# Altium PCB ZYNQ-HS-DEV-PCB.PcbDoc (part 13 of 13)
Units mm, origin at the board's own origin, x right, y up, seen from the top; angles counter-clockwise.
Board outline 125.73 x 111.93 mm, 10 copper layers (S1 (SIG), S2 (GND), S3 (SIG), S4 (GND), S5 (PWR), S6 (SIG), S7 (GND), S8 (SIG), S9 (GND), S10 (SIG)), stack 1.597 mm thick; 545 components, 400 nets, 2449 pads, 1577 vias.
Unrouted connection lines stored in the file: 309.
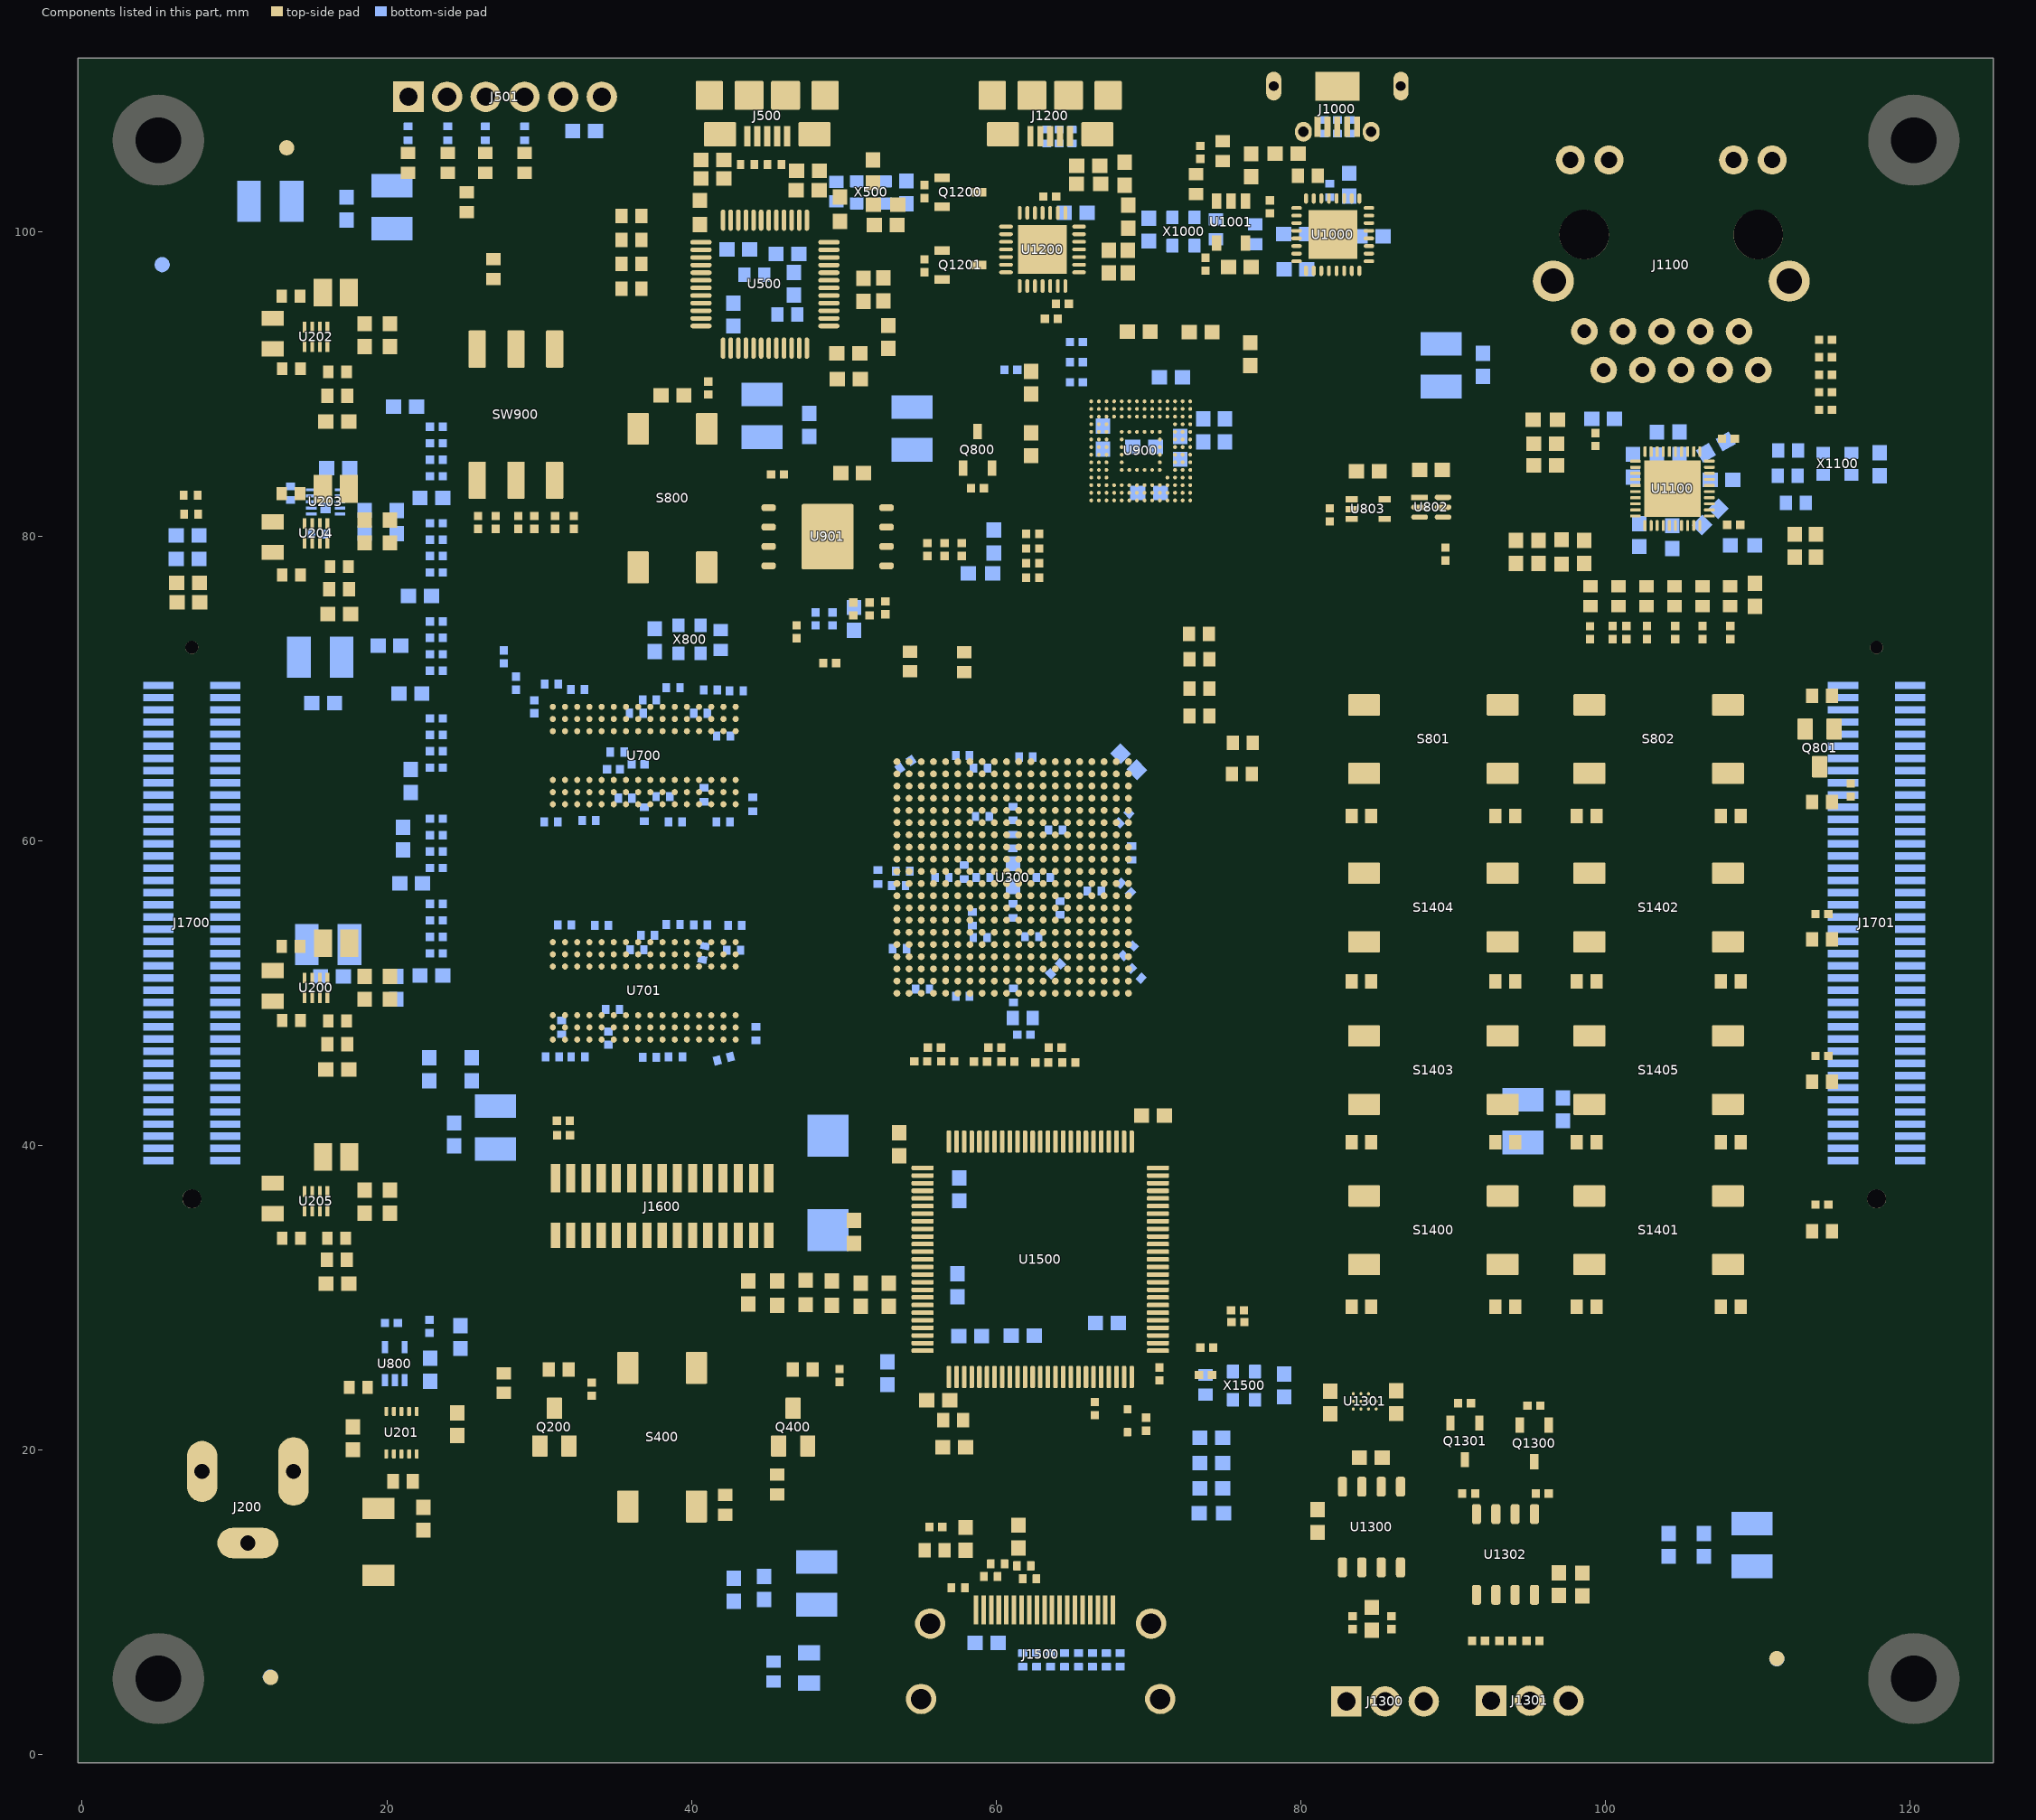
[diagram p20: the components of this part, seen from the top]

## Polygon pours and split planes (outlines as drawn) (continued)
GND on S1 (SIG) "GND_L01_P281" (solid, pour order 281): 18.279,91.95 19.39,91.95 cw(c19.39,91.601) 19.739,91.601 19.739,90.286 ccw(c20.235,90.286) 20.235,89.79 22.925,89.79 ccw(c22.925,90.236) 23.371,90.236 23.371,92.469 ccw(c22.89,92.469) 22.89,92.95 18.367,92.95 ccw(c18.367,92.658) 18.075,92.658 18.075,92.154 ccw(c18.279,92.154)
GND on S1 (SIG) "GND_L01_P283" (solid, pour order 283): 18.279,49.105 19.39,49.105 cw(c19.39,48.756) 19.739,48.756 19.739,47.441 ccw(c20.235,47.441) 20.235,46.945 22.925,46.945 ccw(c22.925,47.391) 23.371,47.391 23.371,49.624 ccw(c22.89,49.624) 22.89,50.105 18.367,50.105 ccw(c18.367,49.813) 18.075,49.813 18.075,49.309 ccw(c18.279,49.309)
GND on S1 (SIG) "GND_L01_P284" (solid, pour order 284): 18.279,35.06 19.39,35.06 cw(c19.39,34.711) 19.739,34.711 19.739,33.396 ccw(c20.235,33.396) 20.235,32.9 22.925,32.9 ccw(c22.925,33.346) 23.371,33.346 23.371,35.579 ccw(c22.89,35.579) 22.89,36.06 18.367,36.06 ccw(c18.367,35.767) 18.075,35.767 18.075,35.263 ccw(c18.279,35.263)
+3V3 on S1 (SIG) "+3V3_L01_P289" (solid, pour order 289): 16.826,40.457 16.826,36.849 ccw(c17.275,36.849) 17.275,36.4 22.9,36.4 ccw(c22.9,36.85) 23.35,36.85 23.35,41.8 ccw(c22.9,41.8) 22.9,42.25 17.25,42.25 ccw(c17.25,41.8) 16.8,41.8 16.8,40.675
GND on S1 (SIG) "GND_L01_P279" (solid, pour order 279): 75.925,104.712 75.925,106.187 cw(c76.125,106.187) 76.125,106.387 78.95,106.387 cw(c78.95,106.237) 79.1,106.237 79.1,104.662 cw(c78.95,104.662) 78.95,104.512 76.125,104.512 cw(c76.125,104.712)
1V8_SW on S1 (SIG) "1V8_SW_L01_P275" (solid, pour order 275): 15.8,93.35 15.8,95.05 16.5,95.05 16.5,96.95 15.1,96.95 15.1,95.05 15.4,95.05 15.4,93.35
1V0_SW on S1 (SIG) "1V0_SW_L01_P278" (solid, pour order 278): 15.8,50.625 15.8,52.325 16.5,52.325 16.5,54.225 15.1,54.225 15.1,52.325 15.4,52.325 15.4,50.625
3V3_SW on S1 (SIG) "3V3_SW_L01_P277" (solid, pour order 277): 15.8,36.6 15.8,38.3 16.5,38.3 16.5,40.2 15.1,40.2 15.1,38.3 15.4,38.3 15.4,36.6
+VCC on S1 (SIG) "+VCC_L01_P285" (solid, pour order 285): 20.675,19.825 20.675,19.425 ccw(c21.05,19.425) 20.812,19.135 cw(c20.402,18.633) 21.05,18.633 21.05,17.712 cw(c20.538,17.712) 20.538,17.2 18.723,17.2 ccw(c18.723,16.652) 18.175,16.652 18.175,15.69 ccw(c18.715,15.69) 18.715,15.15 20.925,15.15 ccw(c20.925,15.525) 21.206,15.276 cw(c21.758,14.787) 21.758,15.525 22.875,15.525 ccw(c22.875,15.925) 23.275,15.925 23.275,19.825 ccw(c22.925,19.825) 22.925,20.175 21.025,20.175 ccw(c21.025,19.825)
+3V3 on S5 (PWR) "S5 (PWR)-+3V3" (solid, pour order 409): 0,0 125.25,0 125.25,111 85.675,111 85.675,108.748 83.85,108.748 83.85,111 80.95,111 80.95,108.748 79.125,108.748 79.125,111 0,111
+1V35 on S5 (PWR) "1v35" (solid, remove dead copper, pour order 297): 55.725,59.875 55.725,60.15 ccw(c55.525,60.15) 55.525,60.35 cw(c55.525,60.604) 55.271,60.604 55.271,62.178 56.071,62.178 ccw(c56.071,62.632) 56.525,62.632 56.525,65.4 ccw(c55.95,65.4) 55.95,65.975 54.725,65.975 ccw(c54.725,65.4) 54.15,65.4 54.15,61.9 cw(c53.3,61.9) 53.3,61.05 44.925,61.05 cw(c44.925,61.975) 44,61.975 44,69.475 ccw(c42.975,69.475) 42.975,70.5 22.275,70.5 cw(c22.275,71.7) 21.075,71.7 21.075,85 ccw(c19.9,85) 19.9,86.175 17.975,86.175 ccw(c17.975,85.125) 16.925,85.125 16.925,65.35 ccw(c18.303,65.35) 18.303,63.972 28.178,63.972 cw(c28.178,63.098) 29.052,63.098 29.052,46.523 ccw(c30.7,46.523) 30.7,44.875 44.55,44.875 ccw(c44.55,45.95) 45.625,45.95 45.625,49.65 cw(c46.125,49.65) 46.125,50.15 54.15,50.15 ccw(c54.15,52.525) 56.525,52.525 56.525,53.6 ccw(c56.15,53.6) 56.15,53.975 55.625,53.975 cw(c55.625,54.325) 55.275,54.325 55.275,59.425 cw(c55.534,59.425) 55.534,59.684 ccw(c55.534,59.875)
+1V0 on S5 (PWR) "S5 (PWR)-+1V0" (solid, pour order 315): 17.325,41.325 61.55,41.325 ccw(c61.55,43.075) 63.3,43.075 63.3,53 cw(c63.4,53) 63.4,53.1 ccw(c63.4,53.625) 63.925,53.625 63.925,59.75 ccw(c62.425,59.75) 62.425,61.25 58.125,61.25 ccw(c58.125,60.8) 57.675,60.8 57.675,53.525 ccw(c58.1,53.525) 58.1,53.1 61.325,53.1 cw(c61.325,52.75) 61.675,52.75 61.675,47.425 cw(c60.975,47.425) 60.975,46.725 24.603,46.725 cw(c24.603,47.978) 23.35,47.978 23.35,55.283 ccw(c22.338,55.283) 22.337,56.295 17.812,56.295 ccw(c17.812,55.283) 16.8,55.283 16.8,54.72 16.826,54.502 16.826,50.895 ccw(c17.275,50.895) 16.964,50.57 17.063,47.722 cw(c16.1,47.688) 16.508,46.816 ccw(c16.807,46.175) 16.1,46.175 16.1,42.55 ccw(c17.325,42.55)
CHASSIS on S5 (PWR) "tg" (solid, pour order 405): 125.231,-0.01 125.259,-0.01 125.259,2.99 125.231,2.99 125.231,107.968 125.232,107.968 125.232,110.968 85.675,110.968 85.675,108.748 83.85,108.748 83.85,110.968 80.95,110.968 80.95,108.748 79.125,108.748 79.125,110.968 36,110.968 36,108.75 ccw(c36.782,108.75) 36.782,107.968 79.3,107.968 79.3,106.15 ccw(c79.725,106.15) 79.725,105.725 80.7,105.725 ccw(c80.7,106.1) 81.075,106.1 81.075,107.075 cw(c81.968,107.075) 81.968,107.968 83.307,107.968 cw(c83.307,107.275) 84,107.275 84,105.725 85.55,105.725 85.55,107.275 cw(c86.243,107.275) 86.243,107.968 116,107.968 116,104.74 ccw(c118.54,104.74) 118.529,102.2 93.25,102.2 ccw(c93.25,101.475) 92.525,101.475 92.525,96.518 ccw(c93.993,96.518) 93.993,95.05 120.75,95.05 cw(c120.75,93.569) 122.231,93.569 122.231,9.25 118.99,9.25 ccw(c118.99,6.71) 116.45,6.71 116.45,2.99 74.635,2.99 cw(c74.635,4.175) 73.45,4.175 73.45,9.875 ccw(c71.9,9.875) 71.9,11.425 53.6,11.425 ccw(c53.6,9.7) 51.875,9.7 51.875,4.95 cw(c49.915,4.95) 49.915,2.99 9.25,2.99 9.25,6.26 ccw(c6.71,6.26) 6.71,8.8 3.001,8.8 3.001,101.75 6.26,101.75 ccw(c6.26,104.29) 8.8,104.29 8.8,108 18.55,108 ccw(c18.55,108.45) 19,108.45 19,111 0,111 0,108 0.001,108 0.001,2.99 0,2.99 0,-0.01 122.231,-0.01 122.231,-0.042 125.231,-0.042
+1V8 on S5 (PWR) "S5 (PWR)-+1V8" (solid, pour order 299): 88.275,22.225 96.7,22.225 ccw(c96.7,23.525) 98,23.525 98,25.275 ccw(c96.2,25.275) 96.2,27.075 94.056,27.075 cw(c94.056,31.156) 89.975,31.156 89.975,64.65 cw(c93.85,64.65) 93.85,68.525 108.318,68.525 ccw(c108.318,69.931) 109.72,70.03 ccw(c108.386,70.227) 108.386,71.575 90.475,71.575 cw(c90.475,73.825) 89.975,71.631 89.975,71.675 89.812,71.675 cw(c90.475,73.825) 88.225,73.825 88.225,79.075 ccw(c87.65,79.075) 87.65,79.65 cw(c87.65,80.525) 86.775,80.525 86.775,100.701 ccw(c86.428,100.701) 86.425,101.049 81.175,101.009 77.853,100.983 ccw(c77.861,99.922) 76.8,99.922 76.8,98.45 ccw(c77.75,98.45) 77.75,97.5 79.56,97.5 cw(c79.56,95.885) 81.175,95.885 81.175,84.225 cw(c78.725,84.225) 78.725,81.775 66.6,81.775 cw(c66.6,82.925) 65.45,82.925 65.45,85.25 ccw(c64.575,85.25) 64.575,86.125 61.25,86.125 cw(c61.25,86.725) 60.65,86.725 60.65,86.925 ccw(c60.1,86.925) 60.1,87.475 47.175,87.475 cw(c47.175,89.5) 45.15,89.5 45.15,93.825 cw(c46.4,93.825) 46.4,95.075 55.175,95.075 ccw(c55.175,98.275) 58.375,98.275 58.375,103.275 ccw(c55.925,103.275) 55.925,105.725 ccw(c55.925,103.35) 53.55,103.35 53.55,99.15 47.475,99.15 ccw(c47.475,92.125) 40.45,92.125 40.45,88.8 cw(c39.125,88.8) 39.125,87.475 35.8,87.475 cw(c35.8,88.05) 35.225,88.05 35.225,91.625 ccw(c34.775,91.625) 34.775,92.075 25.425,92.075 cw(c25.425,93.275) 24.225,93.275 24.225,98.732 ccw(c22.782,98.732) 22.782,100.175 18.125,100.175 ccw(c18.124,98.901) 16.85,98.9 16.85,92.075 16.8,92.025 16.8,89.05 ccw(c18.175,89.05) 18.175,87.675 22.175,87.675 cw(c22.175,86.125) 23.725,86.125 23.725,82.408 ccw(c24.008,82.408) 24.009,82.125 cw(c24.009,81.909) 24.225,81.909 24.225,77.625 ccw(c25.3,77.625) 25.3,76.55 59.475,76.55 cw(c59.475,75.6) 60.425,75.6 60.425,66.556 ccw(c60.856,66.556) 60.856,66.125 cw(c60.856,65.522) 61.459,65.525 61.465,64.414 cw(c60.656,64.409) 60.655,63.6 60.25,63.6 ccw(c60.25,62.707) 59.357,62.707 59.357,61.754 59.377,61.754 ccw(c60.306,59.976) 58.3,59.976 58.3,56.175 ccw(c60.45,56.175) 60.45,54.025 61.518,54.025 ccw(c61.518,54.782) 62.275,54.782 62.275,59.225 ccw(c62,59.225) 62,59.5 60.782,59.5 cw(c60.782,60.457) 59.825,60.457 cw(c60.692,60.457) 60.693,61.325 61.475,61.325 61.475,61.25 64.743,61.25 ccw(c64.743,61.957) 65.45,61.957 65.45,76.075 cw(c66.95,76.075) 66.95,77.575 75.6,77.575 cw(c75.6,75.225) 77.95,75.225 77.95,74.75 ccw(c84.175,74.75) 80.639,69.627 cw(c80.001,68.701) 81.125,68.701 81.125,38.625 cw(c77.95,38.625) 77.95,35.45 51.075,35.45 ccw(c51.075,29.45) 45.075,29.45 ccw(c47.5,29.45) 47.5,27.025 47.85,27.025 ccw(c47.85,29.375) 50.2,29.375 cw(c51.325,29.375) 51.325,30.5 80,30.5 cw(c80,29.375) 81.125,29.375 ccw(c88.275,29.375)
no net on Top Solder (solid): 122.231,-0.042 125.231,-0.042 125.231,-0.01 125.259,-0.01 125.259,2.99 125.231,2.99 125.231,107.968 125.232,107.968 125.232,110.968 36,110.968 36,107.968 116,107.968 116,104.74 ccw(c118.54,104.74) 118.54,102.2 122.231,102.2 122.231,9.25 118.99,9.25 ccw(c118.99,6.71) 116.45,6.71 116.45,2.99 9.25,2.99 9.25,6.26 ccw(c6.71,6.26) 6.71,8.8 3.001,8.8 3.001,101.75 6.26,101.75 ccw(c6.26,104.29) 8.8,104.29 8.8,108 19,108 19,111 0,111 0,108 0.001,108 0.001,2.99 0,2.99 0,-0.01 122.231,-0.01
GND on S2 (GND) "S2 (GND)-GND" (solid, pour order 437): 0,0 125.25,0 125.25,111 85.675,111 85.675,108.748 83.85,108.748 83.85,111 80.95,111 80.95,108.748 79.125,108.748 79.125,111 0,111
CHASSIS on S2 (GND) "S2 (GND)-CHASSIS" (solid, pour order 387): 125.231,-0.01 125.259,-0.01 125.259,2.99 125.231,2.99 125.231,107.968 125.232,107.968 125.232,110.968 85.675,110.968 85.675,108.748 83.85,108.748 83.85,110.968 80.95,110.968 80.95,108.748 79.125,108.748 79.125,110.968 36,110.968 36,107.968 116,107.968 116,104.74 ccw(c118.54,104.74) 118.54,102.2 122.231,102.2 122.231,9.25 118.99,9.25 ccw(c118.99,6.71) 116.45,6.71 116.45,2.99 9.25,2.99 9.25,6.26 ccw(c6.71,6.26) 6.71,8.8 3.001,8.8 3.001,101.75 6.26,101.75 ccw(c6.26,104.29) 8.8,104.29 8.8,108 19,108 19,111 0,111 0,108 0.001,108 0.001,2.99 0,2.99 0,-0.01 122.231,-0.01 122.231,-0.042 125.231,-0.042
GND on S4 (GND) "S4 (GND)-GND" (solid, pour order 433): 0,0 125.25,0 125.25,111 85.675,111 85.675,108.748 83.85,108.748 83.85,111 80.95,111 80.95,108.748 79.125,108.748 79.125,111 0,111
CHASSIS on S4 (GND) "S4 (GND)-CHASSIS" (solid, pour order 401): 125.231,-0.01 125.259,-0.01 125.259,2.99 125.231,2.99 125.231,107.968 125.232,107.968 125.232,110.968 85.675,110.968 85.675,108.748 83.85,108.748 83.85,110.968 80.95,110.968 80.95,108.748 79.125,108.748 79.125,110.968 36,110.968 36,107.968 116,107.968 116,104.74 ccw(c118.54,104.74) 118.54,102.2 122.231,102.2 122.231,9.25 118.99,9.25 ccw(c118.99,6.71) 116.45,6.71 116.45,2.99 9.25,2.99 9.25,6.26 ccw(c6.71,6.26) 6.71,8.8 3.001,8.8 3.001,101.75 6.26,101.75 ccw(c6.26,104.29) 8.8,104.29 8.8,108 19,108 19,111 0,111 0,108 0.001,108 0.001,2.99 0,2.99 0,-0.01 122.231,-0.01 122.231,-0.042 125.231,-0.042
GND on S7 (GND) "S7 (GND)-GND" (solid, pour order 441): 0,0 125.25,0 125.25,111 85.675,111 85.675,108.748 83.85,108.748 83.85,111 80.95,111 80.95,108.748 79.125,108.748 79.125,111 0,111
CHASSIS on S7 (GND) "S7 (GND)-CHASSIS" (solid, pour order 417): 125.231,-0.01 125.259,-0.01 125.259,2.99 125.231,2.99 125.231,107.968 125.232,107.968 125.232,110.968 85.571,110.968 85.571,108.748 83.85,108.748 83.85,110.968 80.95,110.968 80.95,108.748 79.229,108.748 79.229,110.968 36,110.968 36,107.968 116,107.968 116,104.74 ccw(c118.54,104.74) 118.54,102.2 122.231,102.2 122.231,9.25 118.99,9.25 ccw(c118.99,6.71) 116.45,6.71 116.45,2.99 9.25,2.99 9.25,6.26 ccw(c6.71,6.26) 6.71,8.8 3.001,8.8 3.001,101.75 6.26,101.75 ccw(c6.26,104.29) 8.8,104.29 8.8,108 19,108 19,111 0,111 0,108 0.001,108 0.001,2.99 0,2.99 0,-0.01 122.231,-0.01 122.231,-0.042 125.231,-0.042
no net on Bottom Solder (solid): 122.231,-0.042 125.231,-0.042 125.231,-0.01 125.259,-0.01 125.259,2.99 125.231,2.99 125.231,107.968 125.232,107.968 125.232,110.968 36,110.968 36,107.968 116,107.968 116,104.74 ccw(c118.54,104.74) 118.54,102.2 122.231,102.2 122.231,9.25 118.99,9.25 ccw(c118.99,6.71) 116.45,6.71 116.45,2.99 9.25,2.99 9.25,6.26 ccw(c6.71,6.26) 6.71,8.8 3.001,8.8 3.001,101.75 6.26,101.75 ccw(c6.26,104.29) 8.8,104.29 8.8,108 19,108 19,111 0,111 0,108 0.001,108 0.001,2.99 0,2.99 0,-0.01 122.231,-0.01
CHASSIS on S3 (SIG) "S3 (SIG)-CHASSIS" (solid, pour order 397): 125.231,-0.01 125.259,-0.01 125.259,2.99 125.231,2.99 125.231,107.968 125.232,107.968 125.232,110.968 85.675,110.968 85.675,108.748 83.85,108.748 83.85,110.968 80.95,110.968 80.95,108.748 79.125,108.748 79.125,110.968 36,110.968 36,107.968 116,107.968 116,104.74 ccw(c118.54,104.74) 118.54,102.2 122.231,102.2 122.231,9.25 118.99,9.25 ccw(c118.99,6.71) 116.45,6.71 116.45,2.99 9.25,2.99 9.25,6.26 ccw(c6.71,6.26) 6.71,8.8 3.001,8.8 3.001,101.75 6.26,101.75 ccw(c6.26,104.29) 8.8,104.29 8.8,108 19,108 19,111 0,111 0,108 0.001,108 0.001,2.99 0,2.99 0,-0.01 122.231,-0.01 122.231,-0.042 125.231,-0.042
GND on S6 (SIG) "GND_L06_P446" (solid, pour order 446): -0.272,111.384 125.46,111.384 125.46,-0.544 -0.272,-0.544
CHASSIS on S6 (SIG) "S6 (SIG)-CHASSIS" (solid, pour order 413): 125.231,-0.01 125.259,-0.01 125.259,2.99 125.231,2.99 125.231,107.968 125.232,107.968 125.232,110.968 85.675,110.968 85.675,108.748 83.85,108.748 83.85,110.968 80.95,110.968 80.95,108.748 79.125,108.748 79.125,110.968 36,110.968 36,107.968 116,107.968 116,104.74 ccw(c118.54,104.74) 118.54,102.2 122.231,102.2 122.231,9.25 118.99,9.25 ccw(c118.99,6.71) 116.45,6.71 116.45,2.99 9.25,2.99 9.25,6.26 ccw(c6.71,6.26) 6.71,8.8 3.001,8.8 3.001,101.75 6.26,101.75 ccw(c6.26,104.29) 8.8,104.29 8.8,108 19,108 19,111 0,111 0,108 0.001,108 0.001,2.99 0,2.99 0,-0.01 122.231,-0.01 122.231,-0.042 125.231,-0.042
CHASSIS on S8 (SIG) "S8 (SIG)-CHASSIS" (solid, pour order 421): 125.231,-0.01 125.259,-0.01 125.259,2.99 125.231,2.99 125.231,107.968 125.232,107.968 125.232,110.968 85.675,110.968 85.675,108.748 83.85,108.748 83.85,110.968 80.95,110.968 80.95,108.748 79.125,108.748 79.125,110.968 36,110.968 36,107.968 116,107.968 116,104.74 ccw(c118.54,104.74) 118.54,102.2 122.231,102.2 122.231,9.25 118.99,9.25 ccw(c118.99,6.71) 116.45,6.71 116.45,2.99 9.25,2.99 9.25,6.26 ccw(c6.71,6.26) 6.71,8.8 3.001,8.8 3.001,101.75 6.26,101.75 ccw(c6.26,104.29) 8.8,104.29 8.8,108 19,108 19,111 0,111 0,108 0.001,108 0.001,2.99 0,2.99 0,-0.01 122.231,-0.01 122.231,-0.042 125.231,-0.042

## Other copper
S1 (SIG):
  rectangle net +3V3: 69.637,92.96 70.675,94.65
  rectangle net GND: 96.075,83.475 98.125,86.8
  rectangle net GND: 111.95,77.3 114.3,79.125
  rectangle net GND: 66.096,96.3 69.275,98.125
  rectangle net GND: 85.67,21.25 86.825,22.9
  rectangle net GND: 81.175,21.125 82.75,22.975
  rectangle net GND: 96.225,11.397 99.267,13.275
  rectangle net GND: 84.825,16.85 85.95,20.55
  rectangle net GND: 80.625,13.35 81.7,15.1
  rectangle net GND: 51.45,104.1 53.275,105.2
  rectangle net GND: 51.315,99.275 52.7,100.961
  rectangle net GND: 50.775,96.45 53.075,98.1
  rectangle net GND: 42.95,104.008 43.768,105.375
  rectangle net GND: 45.65,102.225 47.375,104.4
  rectangle net GND: 39.375,103.1 41.125,105.35
  rectangle net GND: 52.241,91.2 54.05,92.884
  rectangle net GND: 16.675,20.925 18.85,23.125
  rectangle net GND: 16,23.425 18.025,24.95
  rectangle net +1V0_ETH: 110.275,79.475 114.6,80.8
  rectangle net +1V0_ETH: 109.375,77.9 111.3,80.8
  rectangle net +5V_UART: 64.359,100.775 65.225,101.692
S6 (SIG):
  pour cut-out: 9.039,63.66 20.469,63.647 ccw(c20.472,66.591) 23.416,66.591 cw(c30.55,66.591) 30.55,73.725 50.1,73.725 ccw(c50.1,76.3) 52.675,76.3 52.675,77.475 cw(c55.225,77.475) 55.225,80.025 57.275,80.025 cw(c57.275,77.55) 59.75,77.55 59.75,64.925 ccw(c61.109,64.958) 61.16,63.6 63.943,63.597 ccw(c63.945,64.838) 65.186,64.838 cw(c70.982,64.838) 70.982,70.634 112.666,70.634 cw(c112.666,64.6) 118.7,64.6 118.7,50.625 cw(c117.85,50.625) 117.85,49.775 110.947,49.775 78.575,49.775 ccw(c78.575,46.8) 75.6,46.8 75.6,43.35 cw(c65.525,43.35) 65.525,33.275 9.1,33.275 cw(c9.1,36.375) 6,36.375 6,60.625 cw(c9.035,60.625)
S8 (SIG):
  rectangle net +1V0_ETH: 109.275,77.975 111.3,80.775
S10 (SIG):
  rectangle net +1V35: 16.575,82.55 17.275,83.15
  region net GND: 99.95,88.425 99.95,86.925 101.975,86.925 101.975,88.425
  rectangle net GND: 73.125,87.197 75.511,89.225
  rectangle net GND: 53.5,102.7 54.75,104.375
  rectangle net GND: 50.317,100.775 51.525,102.334
  rectangle net GND: 42.3,96.475 44.025,97.925
  rectangle net GND: 36.225,73.225 39.875,74.825
  rectangle net GND: 22.95,105.675 25.1,106.275
  rectangle net GND: 28,105.675 30.15,106.275
  rectangle net GND: 25.425,105.675 27.575,106.275
  rectangle net GND: 20.35,105.675 22.5,106.275
  rectangle net +1V0_ETH: 109.3,78.025 111.3,80.775
  rectangle net HDR_TCK: 28.035,106.45 30.07,109.45
  rectangle net HDR_TDO: 25.495,106.45 27.53,109.45
  rectangle net HDR_TDI: 22.955,106.45 24.99,109.45
  rectangle net HDR_TMS: 20.415,106.45 22.45,109.45

## Silkscreen, mask and mechanical layers (free items; w line width, h text height)
Top Overlay:
  circle w0.254: c107.697,24.849 r0.506
  circle w0.254: c110.35,22.375 r0.506
  circle w0.254: c115.7,24.694 r0.506
  circle w0.254: c121.1,17.775 r0.506
  circle w0.254: c120.5,13.3 r0.506
  circle w0.254: c114.425,10.5 r0.506
  circle w0.254: c111,10.6 r0.506
  circle w0.254: c108.675,10.375 r0.506
  circle w0.254: c101.8,15.675 r0.506
  circle w0.254: c101.475,19.8 r0.506
  circle w0.2: c37.25,106.475 r0.15
  circle w0.4: c37.993,104.939 r0.2
  circle w0.254: c33.792,105.499 r0.506
  rectangle: 38.425,106.55 38.975,107.025
  region: 37.5,107.225 38,107.725 38.5,107.225
  lines w0.1: 29.975,24.55 32.6,24.55 32.6,25.925 29.975,25.925 29.975,24.55 ; 32.576,104.549 34.976,104.549 34.976,106.499 32.576,106.499 32.576,104.549 ; 46,24.675 48.6,24.675 48.6,25.925 46,25.925 46,24.675 ; 72.4,101.875 73.8,101.875 73.8,104.325 72.4,104.325 72.4,101.875
  lines w0.15: 112.925,33.55 112.925,35.15 115.45,35.15 115.45,33.55 ; 112.95,43.5 112.95,45.1 115.475,45.1 115.475,43.5 ; 112.975,52.75 112.975,54.35 115.5,54.35 115.5,52.75 ; 112.967,61.896 115.464,61.896 115.464,63.249 112.967,63.249 112.967,61.896
  lines w0.2: 37.25,106.025 37.973,105.302 ; 37.25,106.05 37.25,106.15 37.25,106.475 ; 37.973,105.502 38,105.502 38,105.139 ; 37.993,104.939 38,104.939 38,107.25 ; 38,105.67 38.7,106.37 38.7,106.825 ; 101.775,19.575 103.725,17.625 105.975,17.625 ; 102.075,16.15 102.2,16.275 104.725,16.275 106.075,14.925 106.075,14.2 ; 107.675,13.7 107.675,11.6 108.45,10.825 ; 107.675,24.35 107.725,24.3 107.725,19.575 ; 110.425,21.85 111.075,21.2 111.075,19.475 ; 111.025,11.175 111.05,11.2 111.05,13.625 ; 114.082,19.505 114.082,23.082 115.375,24.375 ; 114.7,10.9 115.575,11.775 115.575,13.575 ; 116.425,15.725 118.075,15.725 120.15,13.65 ; 116.45,17.75 117.55,17.75 117.75,17.95 117.75,18.65 117.75,18.85 118.025,19.125 118.375,19.125 118.725,19.125 119,18.85 119,17.95 119.2,17.75 120.55,17.75
  lines w0.3: 19.425,3.3 49.5,3.3 49.5,7.65 19.425,7.65 19.425,3.3
  lines w0.6: 81.448,27.352 81.448,59.452 110.838,59.452 110.848,27.352 81.448,27.352 ; 81.448,59.798 110.838,59.798 110.838,71.498 81.448,71.498 81.448,59.798
  text "UART" at 52.525,106.003 h3
  text "OTG" at 86.55,105.976 h3
  text "LED" at 70.85,103.525 h1
  text "JTAG" at 32.825,102.676 h3
  text "+1V8" at 10.65,98.868 h2
  text "BOOT MODES" at 24.05,94.563 h1.5
  text "ETHERNET" at 94.125,90.425 h4 r90
  text "+1V35" at 10.65,84.993 h2
  text "0" at 25.604,78.089 h2
  text "1" at 28.298,78.078 h2
  text "2" at 30.679,78.081 h2
  text "eMMC" at 67.142,76.908 h3.5
  text "QSPI" at 44.95,75.342 h2
  text "RST" at 37.628,74.982 h2
  text "DDR3L" at 30.115,70.379 h3.5
  text "ZYNQ" at 62.082,66.653 h3.5
  text "MIO50" at 86.51,61.218 h2
  text "MIO51" at 101.643,61.218 h2
  text "PSLD" at 112.9,60.678 h1.15
  text "PS BTNS" at 80.89,59.8 h4 r90
  text "+1V0" at 10.65,55.23 h2
  text "DDR3L" at 30.115,54.929 h3.5
  text "PL35" at 112.925,51.578 h1.15
  text "J15" at 87.732,50.255 h2
  text "J16" at 102.43,50.231 h2
  text "PL34" at 112.9,42.328 h1.15
  text "+3V3" at 10.65,41.468 h2
  text "P16" at 87.53,39.679 h2
  text "T19" at 102.427,39.64 h2
  text "PL13" at 112.875,32.378 h1.15
  text "MIPI CSI-2" at 27.025,29.51 h4
  text "W6" at 102.599,28.948 h2
  text "V6" at 87.902,28.898 h2
  text "PL BTNS" at 80.965,27.35 h4 r90
  text "PG" at 30.393,26.265 h2
  text "DONE" at 45.3,26.268 h2
  text "UK" at 106.25,13.988 h10
  text "PRG" at 36.848,13.44 h2
  text "HDMI" at 69.2,10.975 h4
  text "PWR IN" at 4.675,10.075 h4
  text "+5V" at 9.7,7.385 h4
  text "ZHSD BOARD" at 20,3.953 h6
  text "CAN" at 75.025,3.585 h4
  text "RS485" at 99.45,3.585 h4
Bottom Overlay:
  text "SE" at 120.925,32.81 h4
  text "FEB 2026" at 118.929,25.368 h2
  text "REV A" at 118.979,23.625 h2
  text "ZYNQ HIGH SPEED DESIGN BOARD" at 118.904,21.917 h2
  text "UGUR KELES" at 118.9,20.534 h1

## Text inside footprints (layer, text, board x,y; h text height)
SW900: Top Overlay "ON" at 21.468,89.054 h1